# Altium PCB project1.PcbDoc
Units mil, origin at the board's own origin, x right, y up, seen from the top; angles counter-clockwise.
Board outline 6000 x 4000 mil, 2 copper layers (Top Layer, Bottom Layer); 7 components, 7 nets, 21 pads, 0 vias.
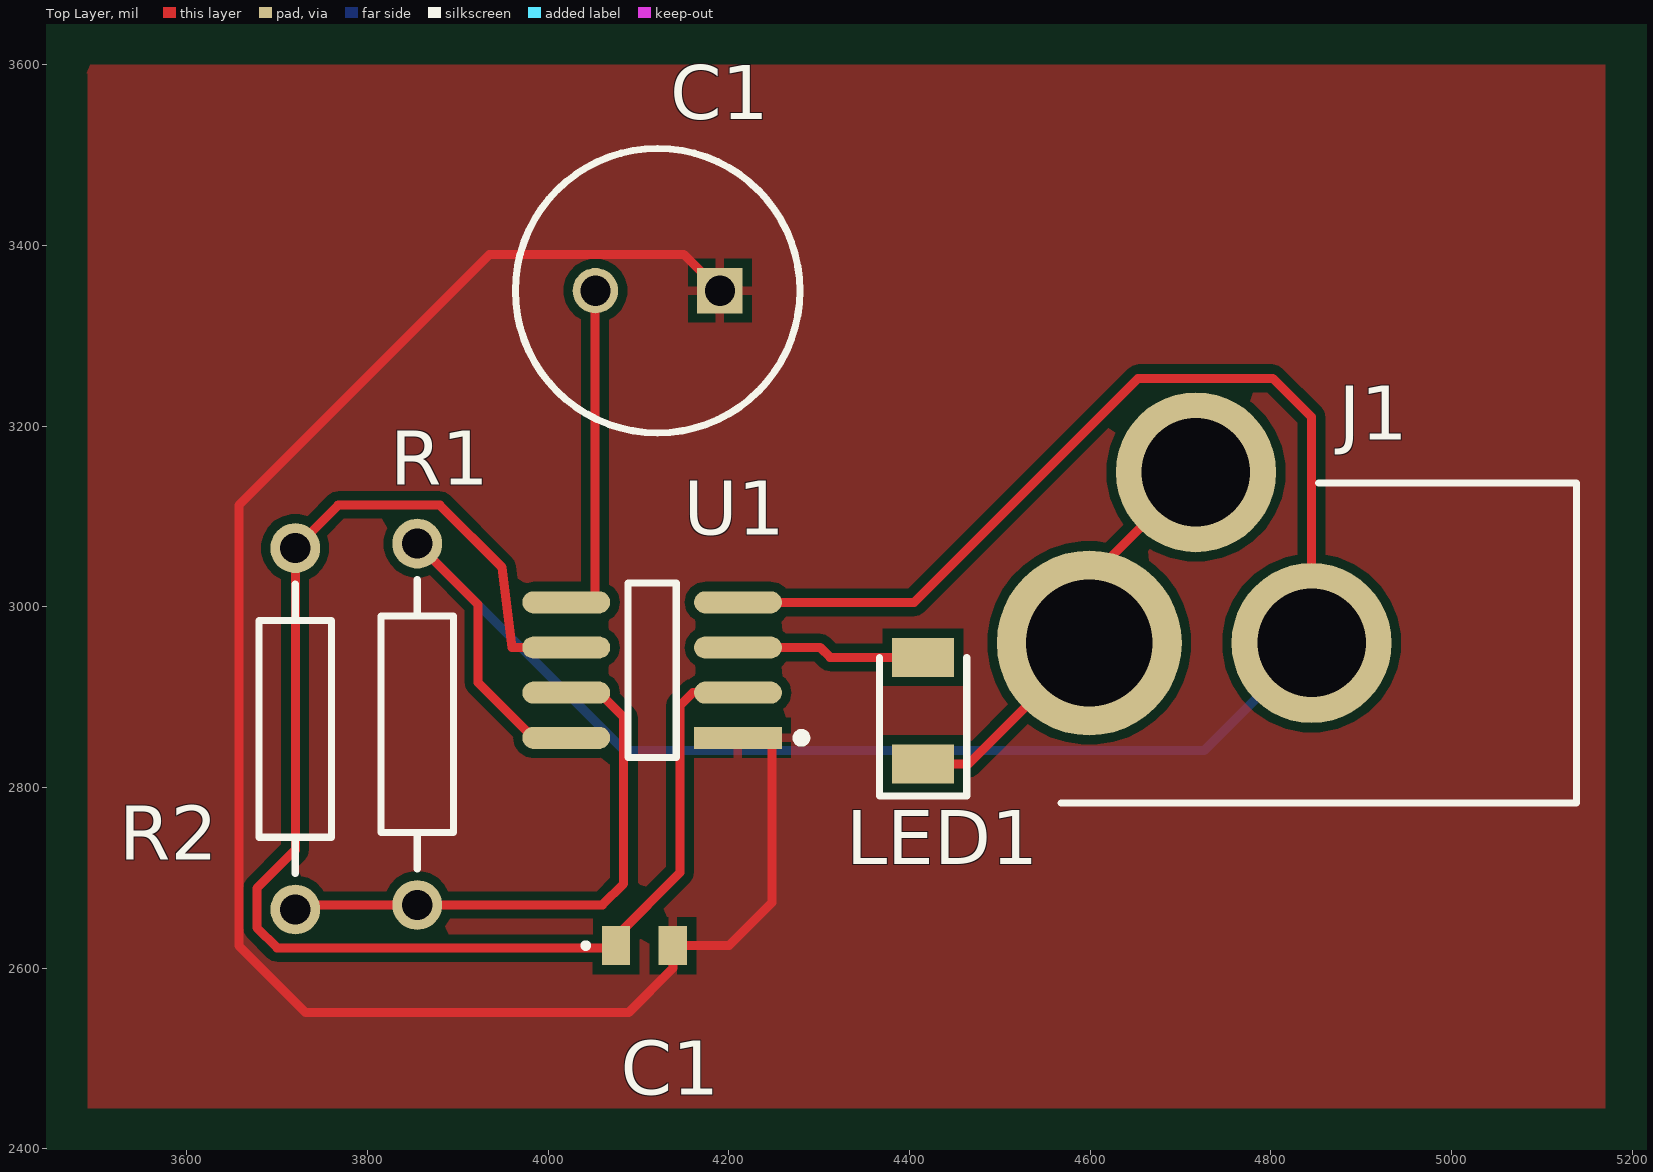
[diagram p0: Top Layer view]
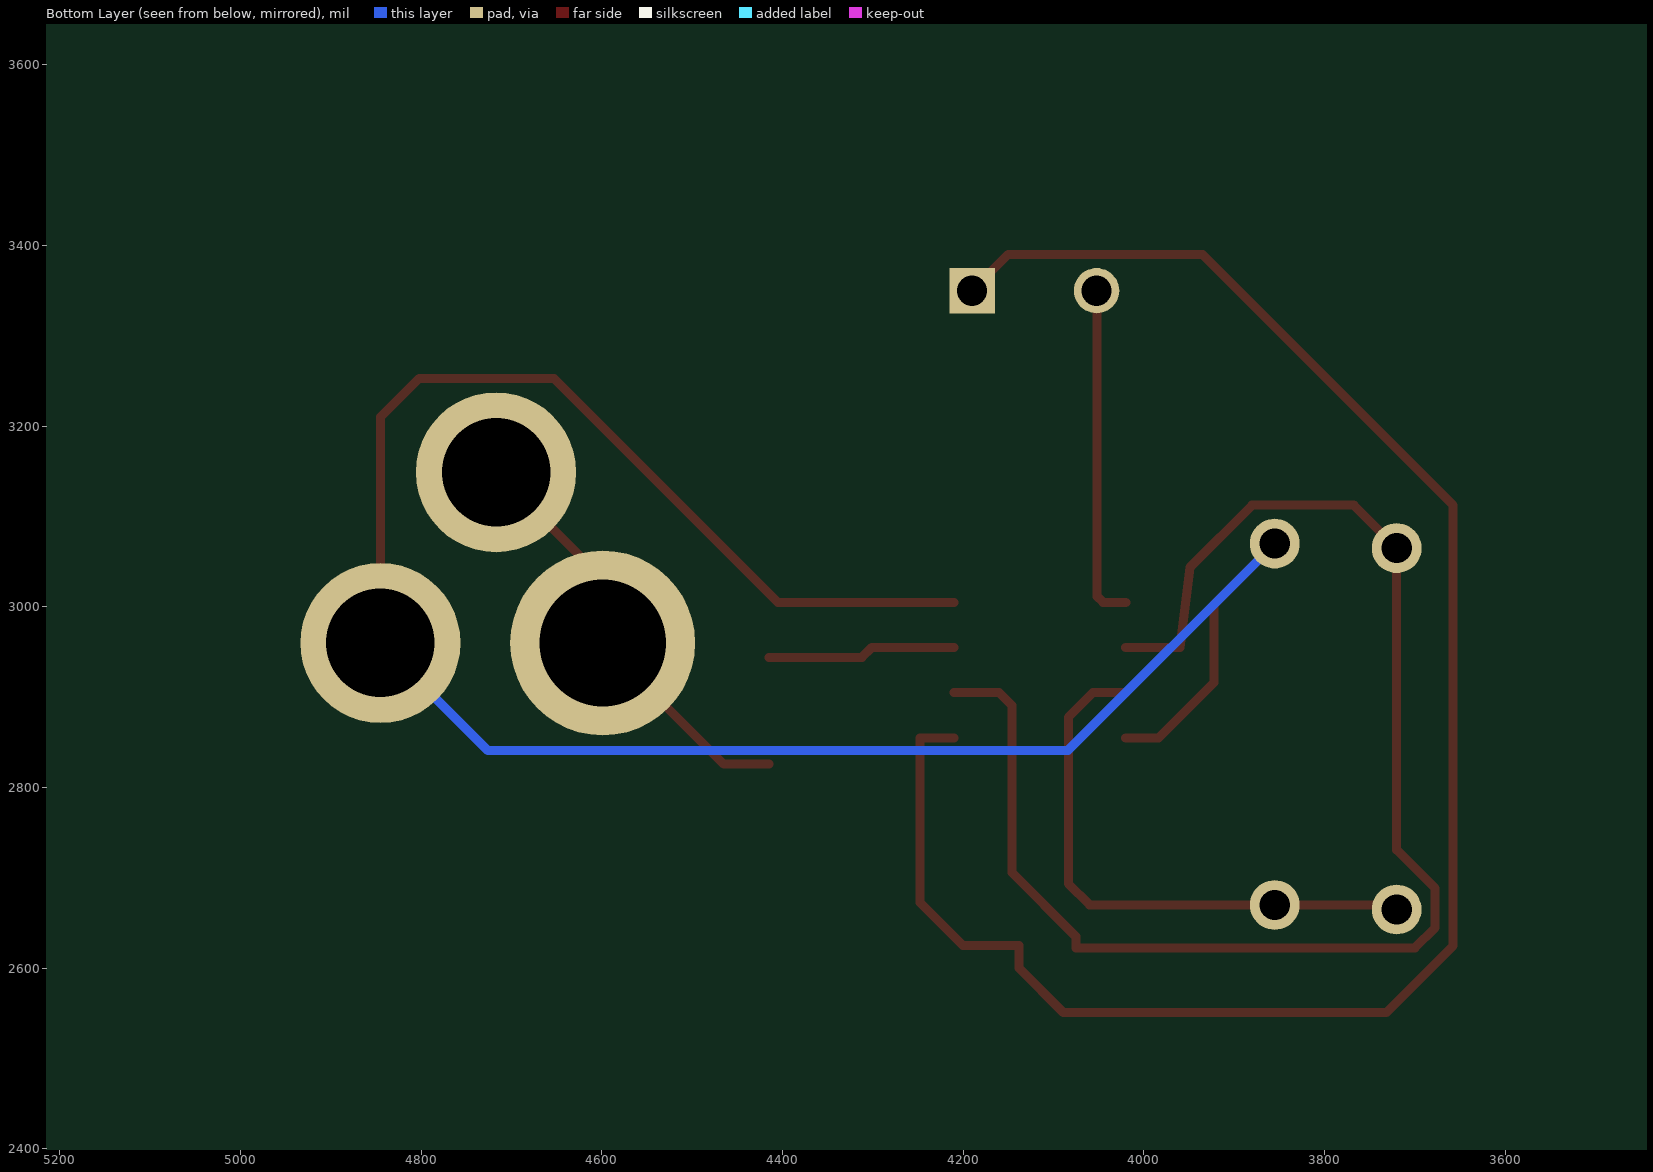
[diagram p1: Bottom Layer view, seen from below]
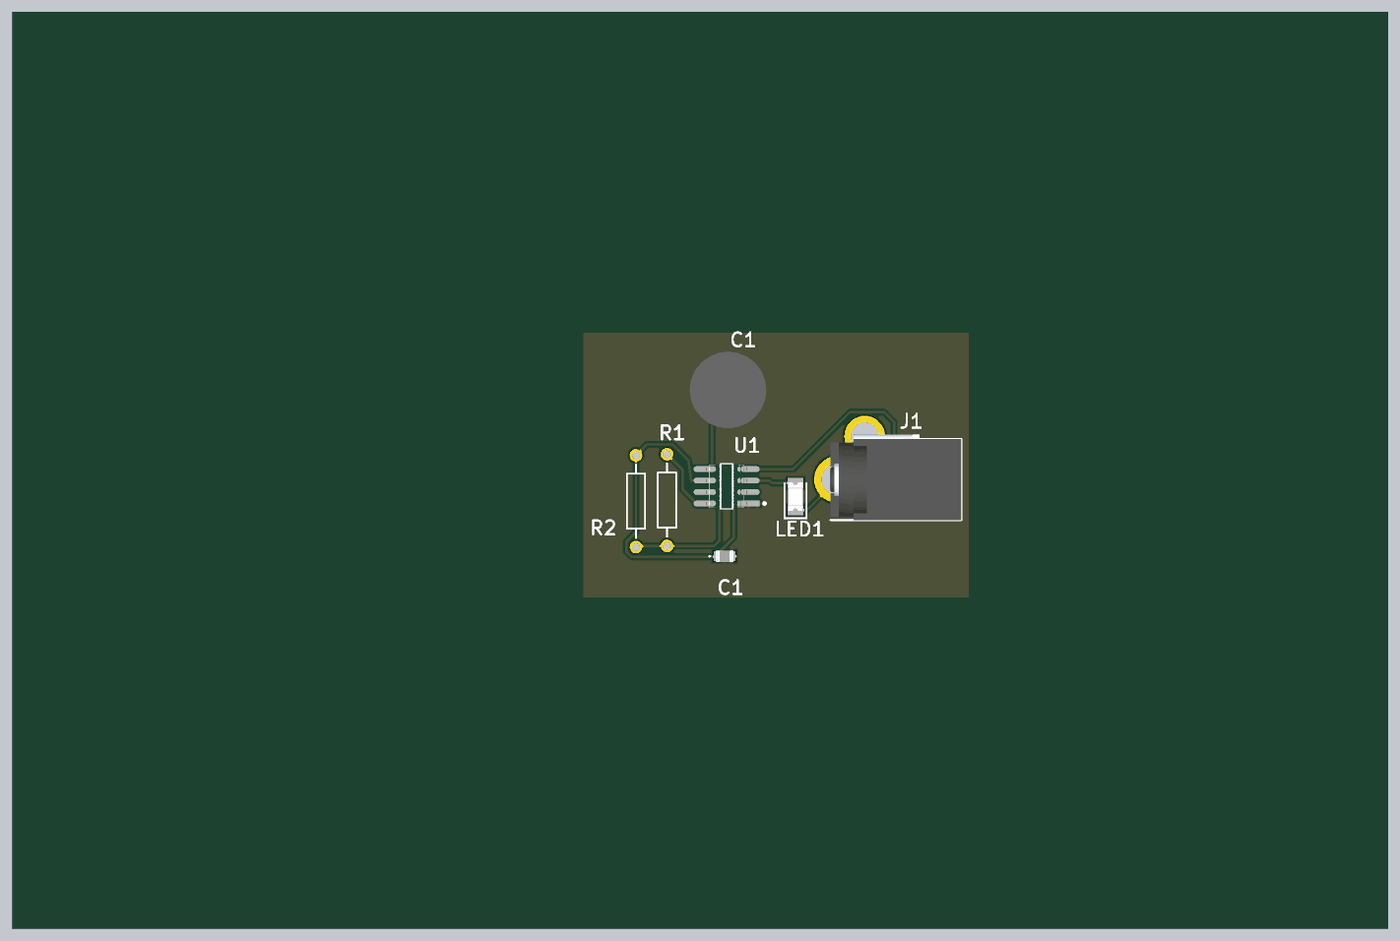
[diagram p2: 3D render of the assembled board from above, using the file's embedded part models]

## Layer stack, top to bottom
Top Solder: solder mask 0.4, Solder Resist, Dk 3.5
Top Layer: signal copper 1.4
Dielectric 1: dielectric 12.6, FR-4, Dk 4.8
Bottom Layer: signal copper 1.4
Bottom Solder: solder mask 0.4, Solder Resist, Dk 3.5

## Board outline
1000,1000 7000,1000 7000,5000 1000,5000

## Design rules (kind name [scope] priority, off if disabled: settings)
Clearance [All] p1: gap=10 ignorepadtopadclearanceinfootprint=FALSE
PolygonConnect [All] p1: connectstyle=Direct reliefconductorwidth=10 reliefentries=4 polygonreliefangle="90 Angle" airgapwidth=10
RoutingVias [All] p1: holewidth=28 width=50 viastyle="Through Hole" minholewidth=28 minwidth=50 maxholewidth=28 maxwidth=50
SolderMaskExpansion [All] p1: expansion=4 istentingtop=FALSE
SupplyNets "Schematic Supply Nets" [InNet('GND')] p1: voltage=0.000
Width [All] p1: maxlimit=10 minlimit=10 preferedwidth=10
30 further rules are at their usual default settings.

## Classes and differential pairs
net class J1_Nets: NetJ1_1 NetJ1_2
net class C?_Nets: GND NetC?_2
net class LED1_Nets: NetJ1_2 NetLED1_2
net class U1_Nets: GND NetC1_1 NetC?_2 NetJ1_1 NetLED1_2 NetR1_1
net class R2_Nets: NetC1_1 NetR1_1
net class R1_Nets: NetJ1_1 NetR1_1
net class C1_Nets: GND NetC1_1

## Components (designator, comment, footprint, x,y, rotation, side; value= is the part's Value field where it differs from the comment)
C1 "ECH-U1H102GX5" ECHU_J1_J2_17_21 4106.5,2625 r0 top
C1 "EEU-FK0J102L" CAPPRD350W65D800H1650 4190,3350 r180 top (schematic designator C?)
J1 "RAPC712X" RAPC712X_1 5138.31,2960 r90 top (schematic designator J?)
LED1 "HSMG-C150" LEDC3216X120N 4415,2885 r90 top
R1 "" AXIAL-0.4 3855,2870 r90 top value=1K
R2 "" AXIAL-0.4 3720,2865 r270 top value=1K
U1 "NE555DR" FP-D0008A-IPC_A 4114.98,2930 r180 top

## Footprints (in the part's own frame and the unit in brackets; to place one, negate y for a bottom-side part, rotate by r counter-clockwise, add the part's x,y. Pads: shape width x height; smd on the part's side, far side on the other; paste and mask are expansions set on the pad)
AXIAL-0.4 [mm] "Axial Device, Thru-Hole; 2 Leads; 0.4 in Pin Spacing"
  round 1.4 hole 0.85: 1(-5.08,0) 2(5.08,0)
  silkscreen extent -4.06,-1.02 4.06,1.02
CAPPRD350W65D800H1650 [mm]
  rect 1.275x1.275 hole 0.85: 1(0,0)
  round 1.275 hole 0.85: 2(3.5,0)
  silkscreen extent -2.25,-4 5.75,4, body extent -2.49,-4.25 6,4.25, height 16.5
ECHU_J1_J2_17_21 [mm]
  rect 0.8x1.1 smd: 1(-0.8,0) 2(0.8,0)
  silkscreen extent -1.7,-0.05 -1.6,0.05, body extent -1,-0.63 1,0.63, height 1.1
FP-D0008A-IPC_A [mil]
  rect 97.21x24.49 smd paste+0 mask+0: 1(-95.02,75)
  rrect100% 97.21x24.49 smd paste+0 mask+0: 2(-95.02,25) 3(-95.02,-25) 4(-95.02,-75) 5(95.02,-75) 6(95.02,-25) 7(95.02,25) 8(95.02,75)
  silkscreen extent -170,-97 27,97, body extent -163,-116 163,116, height 10
LEDC3216X120N [mm]
  rect 1.1x1.75 smd: 1(-1.5,0) 2(1.5,0)
  silkscreen extent -2.4,-1.22 1.5,1.22, body extent -1.6,-0.8 1.6,0.8, height 1.1
RAPC712X_1 [mm]
  round 4.5 hole 3.05: 1(0,7.45) 2(4.8,10.7)
  round 5.2 hole 3.56: 3(0,13.7)
  silkscreen extent -4.5,0 4.5,14.5, body extent -4.52,0 4.98,14.5, height 10.75

## Part data
C1: "Capacitor", Manufacturer_Name=Panasonic, Mouser Part Number=667-ECH-U1H102GX5, Arrow Part Number=ECH-U1H102GX5, Arrow Price/Stock=https://www.arrow.com/en/products/echu1h102gx5/panasonic?region=europe, Datasheet Link=http://industrial.panasonic.com/cdbs/www-data/pdf/RDI0000/ABD0000C173.pdf, Manufacturer_Part_Number=ECH-U1H102GX5, Mouser Price/Stock=https://www.mouser.co.uk/ProductDetail/Panasonic/ECH-U1H102GX5?qs=DWeLBnRir%2FIlo4Nc0F6AmQ%3D%3D
C1: "Capacitor Polarised", Manufacturer_Name=Panasonic, Datasheet Link=http://industrial.panasonic.com/cdbs/www-data/pdf/RDF0000/ABA0000C1015.pdf, Height=16.5mm, Manufacturer_Part_Number=EEU-FK0J102L
J1: "Connector", Manufacturer_Name=Switchcraft, Mouser Part Number=502-RAPC712X, Arrow Part Number=RAPC712X, Arrow Price/Stock=https://www.arrow.com/en/products/rapc712x/switchcraft?utm_currency=USD&region=nac, Datasheet Link=http://www.switchcraft.com/Drawings/rapc712x_cd.pdf, Manufacturer_Part_Number=RAPC712X, Mouser Price/Stock=https://www.mouser.co.uk/ProductDetail/Switchcraft/RAPC712X?qs=QGk6feVlqMKeDw5ej1aubA%3D%3D
LED1: "LED", Manufacturer_Name="Avago Technologies", Mouser Part Number=630-HSMG-C150, Datasheet Link=https://docs.broadcom.com/docs/AV02-0551EN, Height=1.2mm, Manufacturer_Part_Number=HSMG-C150, Mouser Price/Stock=https://www.mouser.co.uk/ProductDetail/Broadcom-Avago/HSMG-C150?qs=YDL0qNrpDT6zJe9nNPPiZQ%3D%3D
R1 R2: library part Res2, "Resistor", LatestRevisionDate=17-Jul-2002, LatestRevisionNote="Re-released for DXP Platform.", PackageDescription="Axial Device, Thru-Hole; 2 Leads; 0.4 in Pin Spacing", PackageReference=AXIAL-0.4, Published=8-Jun-2000, Publisher="Altium Limited"
U1: library part CMP-1685-00007-2, "IC OSC SGL TIMER 100KHZ 8-SOIC", Case/Package=SOIC, Frequency=100kHz, High Level Output Current=-200mA, Low Level Output Current=200mA, Max Operating Temperature=70°C, Max Supply Voltage=16V, Min Operating Temperature=0°C, Min Supply Voltage=4.5V, Operating Supply Current=10mA, Package Quantity=2500, Quiescent Current=15mA, Contact Plating=Gold, Height=1.58mm, Lead Free="Lead Free", Length=4.9mm, Mount="Surface Mount", Number of Pins=8, Number of Timers/Counters=1, Packaging="Tape and Reel", Radiation Hardening=No, REACH SVHC="No SVHC", Weight=0.002561oz, Width=3.91mm

## Nets (pads, with @x,y where several pads share a name; then routed paths per layer and width w, separated by ;. In a path a pad name is that pad's centre, name@x,y a point inside that pad or via, vN(x,y) a via of type N, cw(c..) or ccw(c..) an arc to the next point about the centre after c; other vN are vias at no path point)
GND: C1.1@4190,3350 C1.2@4137.99,2625 U1.1 | length 2057.8
  Top Layer w10: C1.1@4190,3350 4149.9,3390.1 3935.1,3390.1 3657.44,3112.44 3657.44,2625 3731.58,2550.86 4088.85,2550.86 4137.99,2600 4137.99,2625 4200,2625 4247.75,2672.75 4247.75,2855 U1.1
NetC1_1: C1.1@4075,2625 R2.1 U1.2 U1.6 | length 1638.8
  Top Layer w10: U1.6 3960,2955 3949,3043.56 3880,3112.56 3767.56,3112.56 R2.1 3720,2731 3677.44,2688.44 3677.44,2645 3700,2622.44 4075,2622.44 4075,2625 4075,2635 4146,2706 4146,2891 4160,2905 U1.2
NetC?_2: C1.2@4052.2,3350 U1.5 | length 373.1
  Top Layer w10: U1.5 4045.06,3005 4051.76,3011.7 4051.76,3349.55 C1.2@4052.2,3350
NetJ1_1: J1.1 R1.2 U1.4 U1.8 | length 2444.3
  Top Layer w10: R1.2 3922.23,3002.77 3922.23,2916.37 3983.59,2855 U1.8 ; U1.4 4405,3005 4653,3253 4802,3253 4845,3210 J1.1
  Bottom Layer w10: R1.2 4084,2841 4726,2841 J1.1
NetJ1_2: J1.2 J1.3 LED1.1 | length 477.4
  Top Layer w10: LED1.1 4464.88,2825.94 J1.3 4598.94,3030.87 J1.2
NetLED1_2: LED1.2 U1.3 | length 209.5
  Top Layer w10: U1.3 4301.06,2955 4312,2944.06 LED1.2
NetR1_1: R1.1 R2.2 U1.7 | length 634.5
  Top Layer w10: R2.2 3725,2670 R1.1 4060,2670 4083.56,2693.56 4083.56,2877.75 4056.31,2905 U1.7

## Polygon pours and split planes (outlines as drawn)
GND on Top Layer "GND_L01_P000" (solid, pour order 0): 3635,3600 3650,3600 5170,3600 5170,2445 5150,2445 3490,2445 3490,3590 3480,3600